# Altium PCB 01SignalDetect.PcbDoc (part 2 of 2)
Units mil, origin at the board's own origin, x right, y up, seen from the top; angles counter-clockwise.
Board outline 5526.23 x 3781.16 mil, 2 copper layers (Top Layer, Bottom Layer); 155 components, 60 nets, 423 pads, 168 vias.
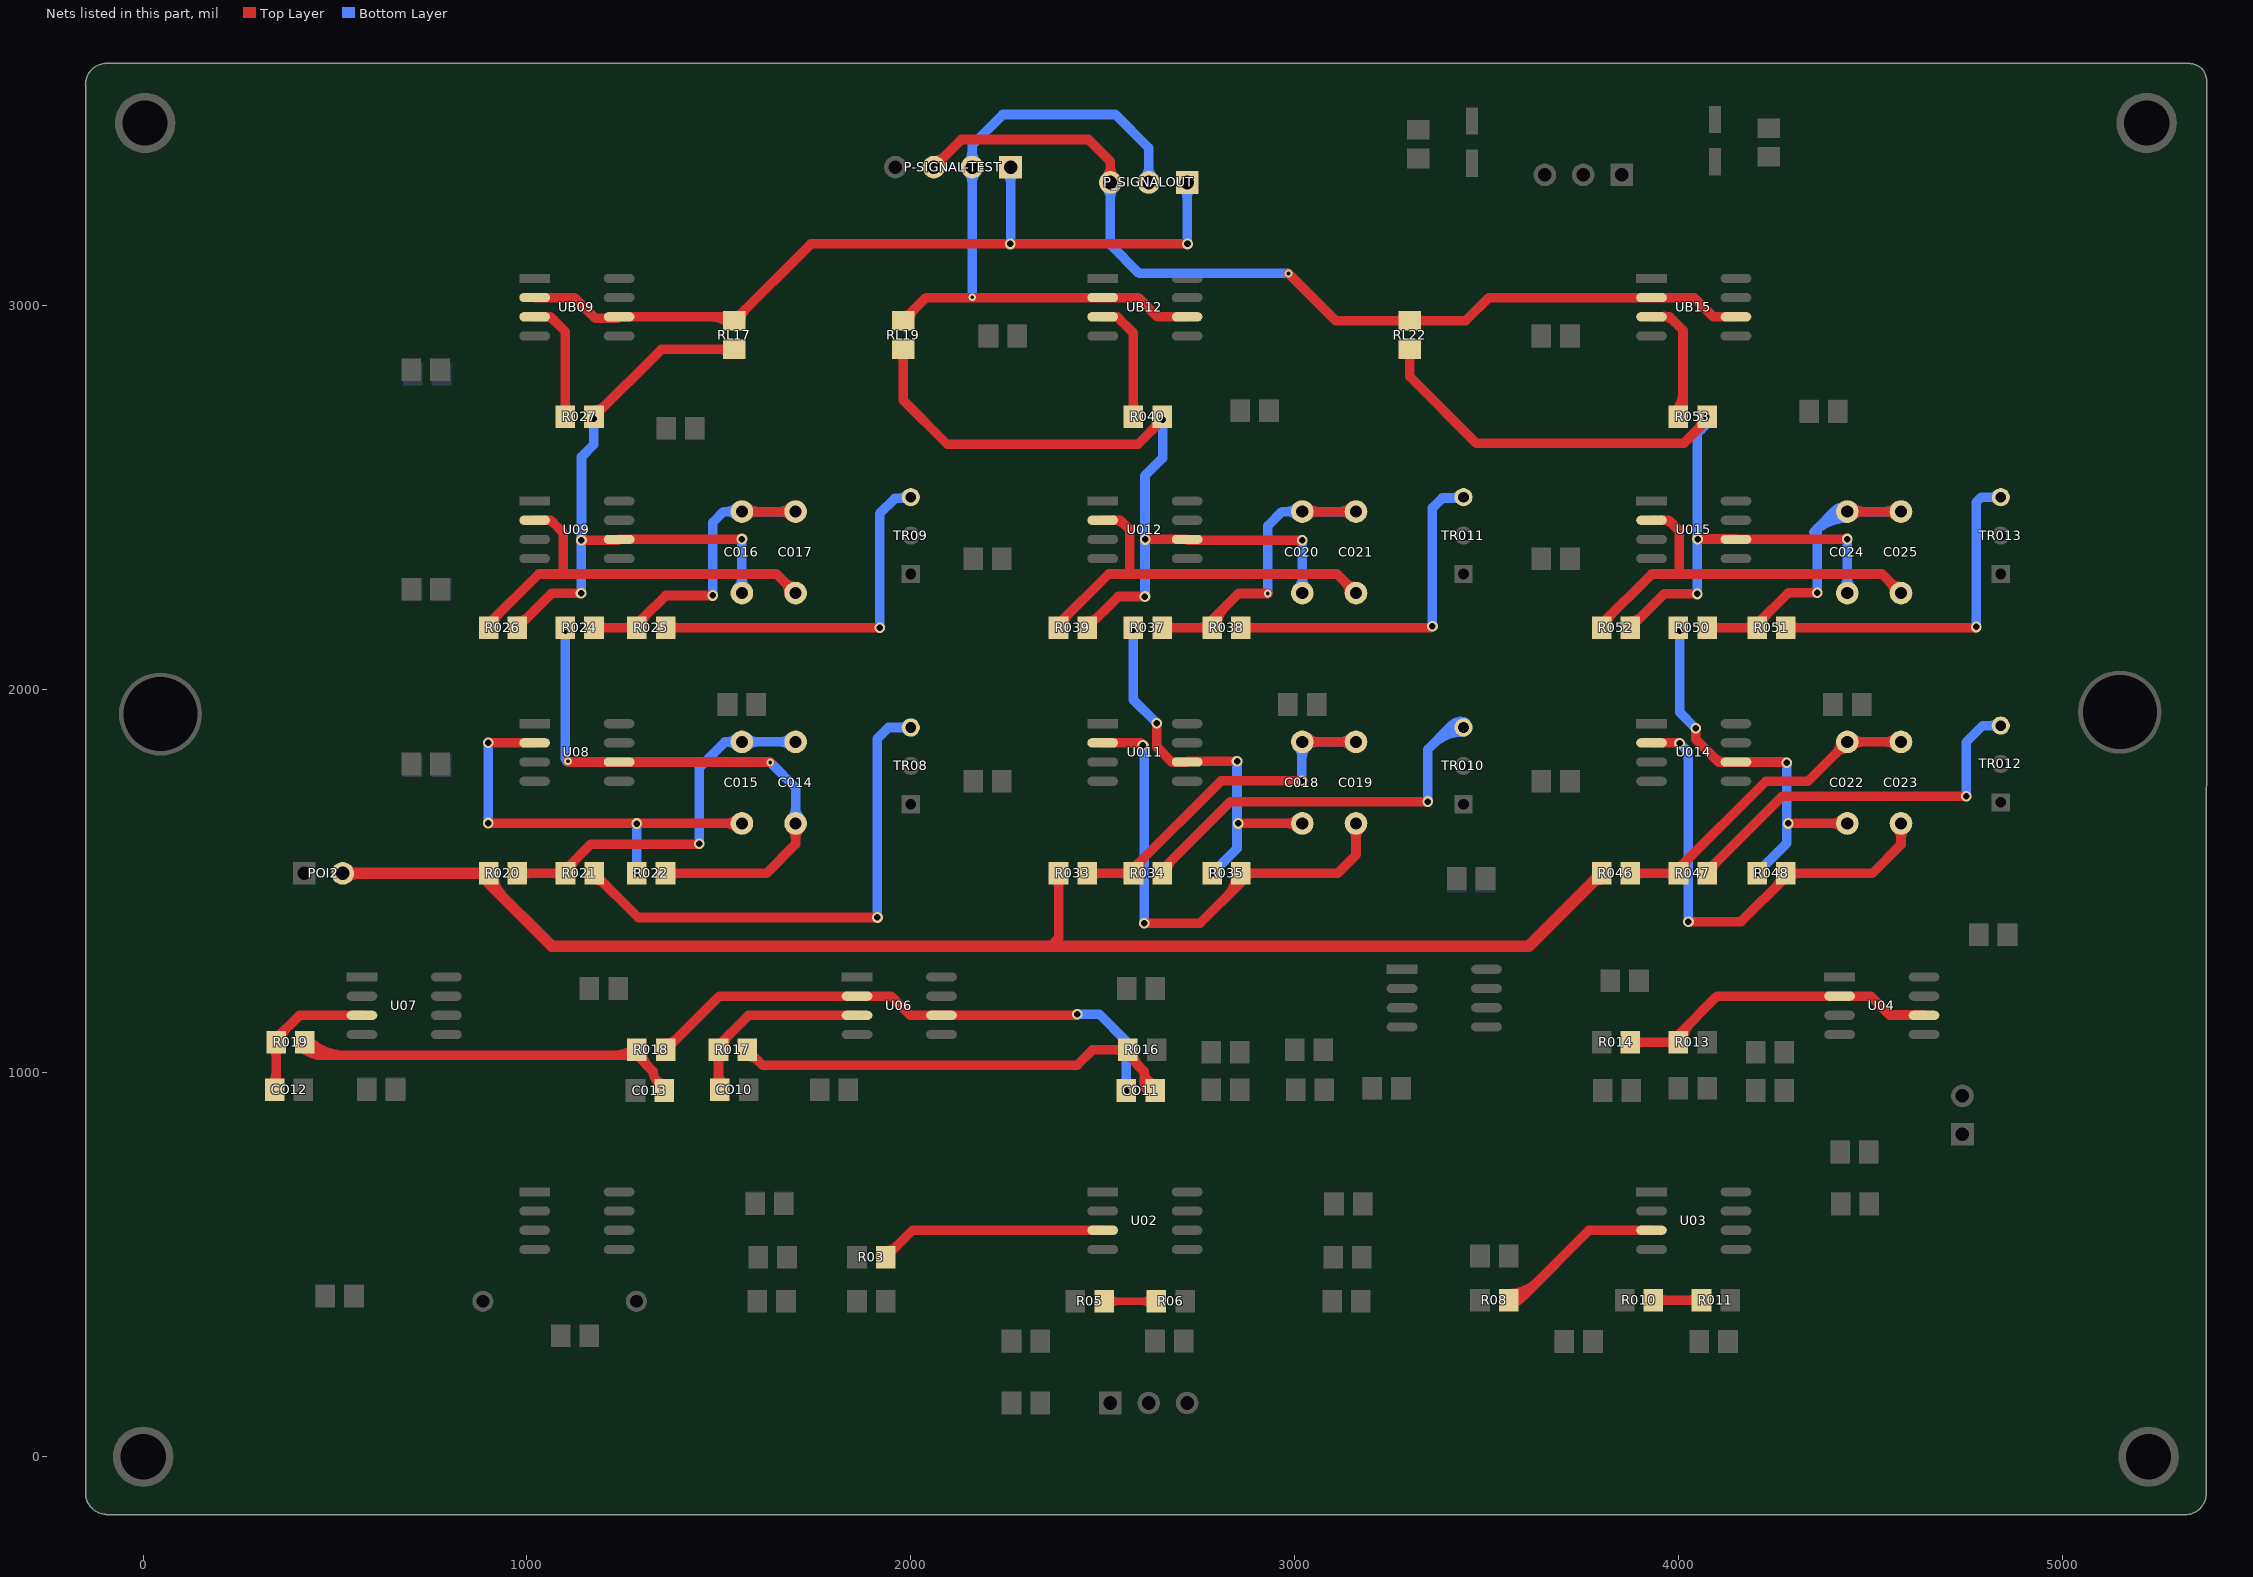
[diagram p2: the nets of this part, all layers, seen from the top]

## Via types
v1: diameter 28, hole 17, Top Layer to Bottom Layer, 87 vias
v2: diameter 20, hole 10, Top Layer to Bottom Layer, 44 vias
v3: diameter 25, hole 15, Top Layer to Bottom Layer, 30 vias
v4: diameter 30, hole 20, Top Layer to Bottom Layer, 7 vias

## Nets (pads, with @x,y where several pads share a name; then routed paths per layer and width w, separated by ;. In a path a pad name is that pad's centre, name@x,y a point inside that pad or via, vN(x,y) a via of type N, cw(c..) or ccw(c..) an arc to the next point about the centre after c; other vN are vias at no path point) (continued)
NetC013_2: C013.2 R018.2 R019.1 | length 1373.8
  Top Layer w25: R019.1@412.96,1067.64 ccw(c465.21,1119.89) 465.21,1046 ; R019.1@421.38,1080 455.38,1046 1272.41,1046 R018.2@1286.41,1060 1286.41,1046.3 1328.69,1004.03 ccw(c1361.91,1004.03) C013.2@1358.68,970.97 ; R019.1@430.64,1085.32 ccw(c525.57,1180.24) 525.57,1046 ; 1230.51,1046 ccw(c1230.51,1111.96) R018.2@1277.16,1065.32 ; R019.1@421.38,1062.97 cw(c421.38,1021.86) 450.45,1050.93 ccw(c421.38,1021.86) R019.1@421.38,1062.97 ; R018.2@1299.5,1056.06 ccw(c1354.67,1056.06) 1315.66,1017.06 cw(c1354.67,1056.06) R018.2@1299.5,1056.06
NetC014_1: C014.1 R022.2 R024.1 U08.6 | length 1875.6
  Top Layer w25: v2(1100,2149) R024.1@1100,2160 ; v2(1107,1812) 1109,1810 U08.6@1240,1810 1633,1810 v2(1634,1809) ; R022.2@1361.02,1520 1624,1520 1700,1596 C014.1@1700,1650 ; 1392.62,1520 cw(c1392.62,1551.6) 1370.28,1529.26 ccw(c1392.62,1551.6) 1392.62,1520 ; 1392.62,1520 ccw(c1392.62,1488.4) 1370.28,1510.74 cw(c1392.62,1488.4) 1392.62,1520 ; 1700,1608.89 cw(c1741.11,1608.89) 1712.04,1637.96 ccw(c1741.11,1608.89) 1700,1608.89 ; 1700,1608.89 ccw(c1658.89,1608.89) 1687.96,1637.96 cw(c1658.89,1608.89) 1700,1608.89
  Bottom Layer w25: v2(1100,2149) 1100,1819 v2(1107,1812) ; v2(1634,1809) 1700,1743 C014.1@1700,1650 ; 1700,1691.11 cw(c1658.89,1691.11) 1687.96,1662.04 ccw(c1658.89,1691.11) 1700,1691.11 ; 1700,1691.11 ccw(c1741.11,1691.11) 1712.04,1662.04 cw(c1741.11,1691.11) 1700,1691.11 ; 1100,1822.86 ccw(c1117.86,1822.86) 1105.23,1810.23 cw(c1117.86,1822.86) 1100,1822.86
NetC014_2: C014.2 C015.2 R020.2 R021.2 | length 1645.1
  Top Layer w25: R020.2@974.8,1520 R021.2@1100.2,1520 1100.2,1529.31 1166.89,1596 1448,1596 v1(1449,1597) ; 1006.41,1520 cw(c1006.41,1551.6) 984.06,1529.26 ccw(c1006.41,1551.6) 1006.41,1520 ; 1006.41,1520 ccw(c1006.41,1488.4) 984.06,1510.74 cw(c1006.41,1488.4) 1006.41,1520 ; 1068.59,1520 cw(c1068.59,1488.4) 1090.94,1510.74 ccw(c1068.59,1488.4) 1068.59,1520 ; 1068.59,1520 ccw(c1068.59,1551.6) 1090.94,1529.26 cw(c1068.59,1551.6) 1068.59,1520 ; R021.2@1113.29,1523.94 cw(c1157.85,1523.94) 1126.34,1555.45 ccw(c1157.85,1523.94) R021.2@1113.29,1523.94
  Bottom Layer w25: v1(1449,1597) 1449,1796 1515.6,1862.6 C015.2@1560,1862.6 C014.2@1700,1862.6 ; 1518.89,1862.6 cw(c1518.89,1821.49) 1547.96,1850.56 ccw(c1518.89,1821.49) 1518.89,1862.6 ; 1518.89,1862.6 ccw(c1518.89,1903.71) 1547.96,1874.64 cw(c1518.89,1903.71) 1518.89,1862.6 ; 1601.11,1862.6 cw(c1601.11,1903.71) 1572.04,1874.64 ccw(c1601.11,1903.71) 1601.11,1862.6 ; 1601.11,1862.6 ccw(c1601.11,1821.49) 1572.04,1850.56 cw(c1601.11,1821.49) 1601.11,1862.6 ; 1658.89,1862.6 cw(c1658.89,1821.49) 1687.96,1850.56 ccw(c1658.89,1821.49) 1658.89,1862.6 ; 1658.89,1862.6 ccw(c1658.89,1903.71) 1687.96,1874.64 cw(c1658.89,1903.71) 1658.89,1862.6
NetC015_1: C015.1 R022.1 U08.2 | length 1252.6
  Top Layer w25: v1(899,1651) 898,1650 C015.1@1560,1650 ; v1(899,1860) U08.2@1020,1860 ; v1@1286,1650 v1(1286.22,1649.78) ; 1518.89,1650 cw(c1518.89,1608.89) 1547.96,1637.96 ccw(c1518.89,1608.89) 1518.89,1650 ; 1518.89,1650 ccw(c1518.89,1691.11) 1547.96,1662.04 cw(c1518.89,1691.11) 1518.89,1650
  Bottom Layer w25: v1(899,1651) v1(899,1860) ; v1(1286.22,1520) v1(1286.22,1649.78)
NetC016_1: C016.1 R026.2 R027.2 RL17.2 U09.6 | length 1945.8
  Top Layer w25: R026.2@974.8,2160 1064.8,2250 v1(1141,2250) ; v1(1142,2388) 1238,2388 U09.6@1240,2390 1559,2390 v1(1560,2391) ; R027.2@1174.8,2710 1350,2885.2 RL17.2@1540,2885.2 ; R027.2@1174.8,2727.03 ccw(c1174.8,2768.14) 1203.87,2739.07 ; RL17.2@1526.81,2875.94 ccw(c1504.46,2853.59) 1504.46,2885.2 ccw(c1504.46,2916.8) RL17.2@1526.81,2894.45 ; R026.2@974.8,2177.03 ccw(c974.8,2218.14) 1003.87,2189.07 cw(c974.8,2218.14) R026.2@974.8,2177.03
  Bottom Layer w25: v1(1141,2250) 1141,2387 v1(1142,2388) 1142,2605 1174,2637 v1(1174,2705) ; C016.1@1560,2250 v1(1560,2391) ; 1560,2291.11 cw(c1518.89,2291.11) 1547.96,2262.04 ccw(c1518.89,2291.11) 1560,2291.11 ; 1560,2291.11 ccw(c1601.11,2291.11) 1572.04,2262.04 cw(c1601.11,2291.11) 1560,2291.11
NetC016_2: C016.2 C017.2 R024.2 R025.2 | length 1821.6
  Top Layer w25: R024.2@1174.8,2160 R025.2@1286.41,2160 1286.41,2169.31 1330,2212.89 1330.89,2212.89 1362,2244 v1(1484,2244) ; C016.2@1560,2462.6 C017.2@1700,2462.6 ; 1206.41,2160 cw(c1206.41,2191.6) 1184.06,2169.26 ccw(c1206.41,2191.6) 1206.41,2160 ; 1206.41,2160 ccw(c1206.41,2128.4) 1184.06,2150.74 cw(c1206.41,2128.4) 1206.41,2160 ; 1254.81,2160 cw(c1254.81,2128.4) 1277.16,2150.74 ccw(c1254.81,2128.4) 1254.81,2160 ; 1254.81,2160 ccw(c1254.81,2191.6) 1277.16,2169.26 cw(c1254.81,2191.6) 1254.81,2160 ; 1601.11,2462.6 cw(c1601.11,2503.71) 1572.04,2474.64 ccw(c1601.11,2503.71) 1601.11,2462.6 ; 1601.11,2462.6 ccw(c1601.11,2421.49) 1572.04,2450.56 cw(c1601.11,2421.49) 1601.11,2462.6 ; 1658.89,2462.6 cw(c1658.89,2421.49) 1687.96,2450.56 ccw(c1658.89,2421.49) 1658.89,2462.6 ; 1658.89,2462.6 ccw(c1658.89,2503.71) 1687.96,2474.64 cw(c1658.89,2503.71) 1658.89,2462.6 ; R025.2@1299.5,2163.94 cw(c1344.07,2163.94) 1312.55,2195.45 ccw(c1344.07,2163.94) R025.2@1299.5,2163.94
  Bottom Layer w25: v1(1484,2244) 1484,2434 1512.6,2462.6 C016.2@1560,2462.6 C017.2@1700,2462.6 ; 1518.89,2462.6 cw(c1518.89,2421.49) 1547.96,2450.56 ccw(c1518.89,2421.49) 1518.89,2462.6 ; 1518.89,2462.6 ccw(c1518.89,2503.71) 1547.96,2474.64 cw(c1518.89,2503.71) 1518.89,2462.6 ; 1601.11,2462.6 cw(c1601.11,2503.71) 1572.04,2474.64 ccw(c1601.11,2503.71) 1601.11,2462.6 ; 1601.11,2462.6 ccw(c1601.11,2421.49) 1572.04,2450.56 cw(c1601.11,2421.49) 1601.11,2462.6 ; 1658.89,2462.6 cw(c1658.89,2421.49) 1687.96,2450.56 ccw(c1658.89,2421.49) 1658.89,2462.6 ; 1658.89,2462.6 ccw(c1658.89,2503.71) 1687.96,2474.64 cw(c1658.89,2503.71) 1658.89,2462.6
NetC017_1: C017.1 R026.1 U09.2 | length 1362.4
  Top Layer w25: R026.1@900,2160 900,2169.31 1030.72,2300.03 1649.97,2300.03 C017.1@1700,2250 ; U09.2@1020,2440 1062,2440 1095,2407 1095,2314 ; 1670.93,2279.07 cw(c1641.86,2250) 1682.97,2250 ccw(c1641.86,2250) 1670.93,2279.07 ; 1670.93,2279.07 ccw(c1700,2308.14) 1700,2267.03 cw(c1700,2308.14) 1670.93,2279.07 ; R026.1@913.09,2163.94 cw(c957.65,2163.94) 926.14,2195.45 ccw(c957.65,2163.94) R026.1@913.09,2163.94 ; U09.2@1047.95,2440.5 cw(c1050.58,2414.58) 1069,2433 ccw(c1050.58,2414.58) U09.2@1047.95,2440.5 ; U09.2@1048,2440.5 cw(c1048,2407.91) 1071.05,2430.95 ccw(c1048,2407.91) U09.2@1048,2440.5
NetC018_1: C018.1 R035.2 R037.1 U011.6 | length 1218.8
  Top Layer w25: v1(2641,1911) 2641,1849 2680,1810 U011.6@2720,1810 2722,1812 v1(2850,1812) ; v1(2853,1650) C018.1@3020,1650 ; 2978.89,1650 cw(c2978.89,1608.89) 3007.96,1637.96 ccw(c2978.89,1608.89) 2978.89,1650 ; 2978.89,1650 ccw(c2978.89,1691.11) 3007.96,1662.04 cw(c2978.89,1691.11) 2978.89,1650 ; 2672.37,1817.63 ccw(c2692,1837.26) 2692,1809.5 cw(c2692,1837.26) 2672.37,1817.63
  Bottom Layer w25: v1(2580,2155) 2580,1972 v1(2641,1911) ; v1(2785.2,1520) 2850,1584.8 v1@2850,1650 ; v1(2850,1812) v1@2850,1650 ; v1(2853,1650) v1@2850,1650
NetC018_2: C018.2 C019.2 R033.2 R034.2 | length 1987.1
  Top Layer w25: R033.2@2459.8,1520 R034.2@2580.2,1520 ; R034.2@2580.2,1529.31 R034.2@2580.2,1520 ; v1(3019,1761) 2808,1761 2580.2,1533.2 R034.2@2580.2,1520 ; C018.2@3020,1862.6 C019.2@3160,1862.6 ; 2491.41,1520 cw(c2491.41,1551.6) 2469.06,1529.26 ccw(c2491.41,1551.6) 2491.41,1520 ; 2491.41,1520 ccw(c2491.41,1488.4) 2469.06,1510.74 cw(c2491.41,1488.4) 2491.41,1520 ; 2548.59,1520 cw(c2548.59,1488.4) 2570.94,1510.74 ccw(c2548.59,1488.4) 2548.59,1520 ; 2548.59,1520 ccw(c2548.59,1551.6) 2570.94,1529.26 cw(c2548.59,1551.6) 2548.59,1520 ; 3061.11,1862.6 cw(c3061.11,1903.71) 3032.04,1874.64 ccw(c3061.11,1903.71) 3061.11,1862.6 ; 3061.11,1862.6 ccw(c3061.11,1821.49) 3032.04,1850.56 cw(c3061.11,1821.49) 3061.11,1862.6 ; 3118.89,1862.6 cw(c3118.89,1821.49) 3147.96,1850.56 ccw(c3118.89,1821.49) 3118.89,1862.6 ; 3118.89,1862.6 ccw(c3118.89,1903.71) 3147.96,1874.64 cw(c3118.89,1903.71) 3118.89,1862.6 ; R034.2@2593.29,1523.94 cw(c2647.24,1523.94) 2609.09,1562.09 ccw(c2647.24,1523.94) R034.2@2593.29,1523.94
  Bottom Layer w25: v1(3019,1761) 3019,1861.6 C018.2@3020,1862.6 C019.2@3160,1862.6 ; C018.2@3032.04,1850.56 cw(c3061.11,1821.49) 3061.11,1862.6 ; C018.2@3032.04,1850.56 ccw(c3063.52,1819.08) 3019,1819.08 cw(c3063.52,1819.08) C018.2@3032.04,1850.56 ; C018.2@3032.04,1850.56 cw(c3061.11,1821.49) 3061.11,1862.6 ; 3061.11,1862.6 cw(c3061.11,1903.71) 3032.04,1874.64 ccw(c3061.11,1903.71) 3061.11,1862.6 ; 3118.89,1862.6 cw(c3118.89,1821.49) 3147.96,1850.56 ccw(c3118.89,1821.49) 3118.89,1862.6 ; 3118.89,1862.6 ccw(c3118.89,1903.71) 3147.96,1874.64 cw(c3118.89,1903.71) 3118.89,1862.6 ; C018.2@3007.96,1850.56 cw(c2981.31,1823.9) 3019,1823.9 ccw(c2981.31,1823.9) C018.2@3007.96,1850.56
NetC019_1: C019.1 R035.1 U011.2 | length 1683.7
  Top Layer w25: U011.2@2500,1860 2599,1860 v1(2605,1854) ccw(c2590.51,1839.51) 2590.51,1860 ; 2586.89,1860 cw(c2586.89,1835.89) v1@2603.94,1852.94 ; v1(2608,1390) 2754,1390 2860,1496 R035.1@2860,1520 3112,1520 3160,1568 C019.1@3160,1650 ; 2891.6,1520 cw(c2891.6,1551.6) 2869.26,1529.26 ccw(c2891.6,1551.6) 2891.6,1520 ; 2891.6,1520 ccw(c2891.6,1488.4) 2869.26,1510.74 cw(c2891.6,1488.4) 2891.6,1520 ; 3160,1608.89 cw(c3201.11,1608.89) 3172.04,1637.96 ccw(c3201.11,1608.89) 3160,1608.89 ; 3160,1608.89 ccw(c3118.89,1608.89) 3147.96,1637.96 cw(c3118.89,1608.89) 3160,1608.89 ; 2823.47,1459.47 ccw(c2766.87,1516.06) 2846.91,1516.06 cw(c2766.87,1516.06) 2823.47,1459.47
  Bottom Layer w25: v1(2605,1854) 2608,1851 v1(2608,1390)
NetC020_1: C020.1 R039.2 R040.2 RL19.2 U012.6 | length 2381.1
  Top Layer w25: RL19.2@1970.74,2875.94 cw(c1948.4,2853.59) 1980,2853.59 cw(c2011.6,2853.59) RL19.2@1989.26,2875.94 ; RL19.2@1980,2885.2 1980,2753 2095,2638 2592.11,2638 2654.8,2700.69 R040.2@2654.8,2710 ; R039.2@2459.8,2160 2541,2241.2 v1(2610.2,2241.2) ; v1(2611.2,2390) U012.6@2720,2390 2722,2388 v1(3020,2388) ; 2628.66,2674.55 ccw(c2597.15,2706.06) R040.2@2641.71,2706.06 ; R039.2@2459.8,2177.03 ccw(c2459.8,2218.14) 2488.87,2189.07 cw(c2459.8,2218.14) R039.2@2459.8,2177.03
  Bottom Layer w25: v1(2610.2,2241.2) v1@2610.2,2389 ; v1(2611.2,2390) v1@2610.2,2389 ; v1(2656,2702) 2656,2602 2610.2,2556.2 v1@2610.2,2389 ; C020.1@3020,2250 v1(3020,2388) ; 3020,2291.11 cw(c2978.89,2291.11) 3007.96,2262.04 ccw(c2978.89,2291.11) 3020,2291.11 ; 3020,2291.11 ccw(c3061.11,2291.11) 3032.04,2262.04 cw(c3061.11,2291.11) 3020,2291.11
NetC020_2: C020.2 C021.2 R037.2 R038.2 | length 1841.1
  Top Layer w25: R037.2@2654.8,2160 R038.2@2785.2,2160 2785.2,2180.2 2854,2249 v2(2930,2249) ; C020.2@3020,2462.6 C021.2@3160,2462.6 ; 2686.41,2160 cw(c2686.41,2191.6) 2664.06,2169.26 ccw(c2686.41,2191.6) 2686.41,2160 ; 2686.41,2160 ccw(c2686.41,2128.4) 2664.06,2150.74 cw(c2686.41,2128.4) 2686.41,2160 ; 2753.59,2160 cw(c2753.59,2128.4) 2775.94,2150.74 ccw(c2753.59,2128.4) 2753.59,2160 ; 2753.59,2160 ccw(c2753.59,2191.6) 2775.94,2169.26 cw(c2753.59,2191.6) 2753.59,2160 ; 3061.11,2462.6 cw(c3061.11,2503.71) 3032.04,2474.64 ccw(c3061.11,2503.71) 3061.11,2462.6 ; 3061.11,2462.6 ccw(c3061.11,2421.49) 3032.04,2450.56 cw(c3061.11,2421.49) 3061.11,2462.6 ; 3118.89,2462.6 cw(c3118.89,2421.49) 3147.96,2450.56 ccw(c3118.89,2421.49) 3118.89,2462.6 ; 3118.89,2462.6 ccw(c3118.89,2503.71) 3147.96,2474.64 cw(c3118.89,2503.71) 3118.89,2462.6 ; R038.2@2798.29,2163.94 cw(c2869.14,2163.94) 2819.04,2214.04 ccw(c2869.14,2163.94) R038.2@2798.29,2163.94
  Bottom Layer w25: v2(2930,2249) 2930,2425 2967.6,2462.6 C020.2@3020,2462.6 C021.2@3160,2462.6 ; 2978.89,2462.6 cw(c2978.89,2421.49) 3007.96,2450.56 ccw(c2978.89,2421.49) 2978.89,2462.6 ; 2978.89,2462.6 ccw(c2978.89,2503.71) 3007.96,2474.64 cw(c2978.89,2503.71) 2978.89,2462.6 ; 3061.11,2462.6 cw(c3061.11,2503.71) 3032.04,2474.64 ccw(c3061.11,2503.71) 3061.11,2462.6 ; 3061.11,2462.6 ccw(c3061.11,2421.49) 3032.04,2450.56 cw(c3061.11,2421.49) 3061.11,2462.6 ; 3118.89,2462.6 cw(c3118.89,2421.49) 3147.96,2450.56 ccw(c3118.89,2421.49) 3118.89,2462.6 ; 3118.89,2462.6 ccw(c3118.89,2503.71) 3147.96,2474.64 cw(c3118.89,2503.71) 3118.89,2462.6
NetC021_1: C021.1 R039.1 U012.2 | length 1379.9
  Top Layer w25: R039.1@2385,2160 2385,2169.31 2515.72,2300.03 2570,2300.03 ; U012.2@2500,2440 2546,2440 2570,2416 2570,2300.03 ; C021.1@3160,2250 3109.97,2300.03 2570,2300.03 ; 3130.93,2279.07 cw(c3101.86,2250) 3142.97,2250 ccw(c3101.86,2250) 3130.93,2279.07 ; 3130.93,2279.07 ccw(c3160,2308.14) 3160,2267.03 cw(c3160,2308.14) 3130.93,2279.07 ; R039.1@2398.09,2163.94 cw(c2442.65,2163.94) 2411.14,2195.45 ccw(c2442.65,2163.94) R039.1@2398.09,2163.94 ; U012.2@2527.94,2440.5 cw(c2531.59,2407.59) 2555,2431 ccw(c2531.59,2407.59) U012.2@2527.94,2440.5 ; U012.2@2528,2440.5 cw(c2528,2398.25) 2557.87,2428.13 ccw(c2528,2398.25) U012.2@2528,2440.5
NetC022_1: C022.1 R048.2 R050.1 U014.6 | length 1231.6
  Top Layer w25: v1(4045,1898) 4045,1870 4105,1810 U014.6@4150,1810 4280,1810 v1(4282,1808) ; R048.2@4205.2,1520 v1(4205.2,1521.2) ; v1(4286,1650) C022.1@4440,1650 ; 4398.89,1650 cw(c4398.89,1608.89) 4427.96,1637.96 ccw(c4398.89,1608.89) 4398.89,1650 ; 4398.89,1650 ccw(c4398.89,1691.11) 4427.96,1662.04 cw(c4398.89,1691.11) 4398.89,1650 ; 4093.83,1821.17 ccw(c4122,1849.33) 4122,1809.5 cw(c4122,1849.33) 4093.83,1821.17
  Bottom Layer w25: v1(4003,2152) 4003,1940 v1(4045,1898) ; v1(4205.2,1521.2) 4282,1598 v1@4282,1650 ; v1(4282,1808) v1@4282,1650 ; v1(4286,1650) v1@4282,1650
NetC022_2: C022.2 C023.2 R046.2 R047.2 | length 1521.2
  Top Layer w25: R046.2@3874.8,1520 R047.2@4000.2,1520 4000.2,1532.2 4228,1760 4337.4,1760 C022.2@4440,1862.6 C023.2@4580,1862.6 ; 3906.41,1520 cw(c3906.41,1551.6) 3884.06,1529.26 ccw(c3906.41,1551.6) 3906.41,1520 ; 3906.41,1520 ccw(c3906.41,1488.4) 3884.06,1510.74 cw(c3906.41,1488.4) 3906.41,1520 ; 3968.59,1520 cw(c3968.59,1488.4) 3990.94,1510.74 ccw(c3968.59,1488.4) 3968.59,1520 ; 3968.59,1520 ccw(c3968.59,1551.6) 3990.94,1529.26 cw(c3968.59,1551.6) 3968.59,1520 ; 4410.93,1833.53 cw(c4440,1804.46) 4440,1845.57 ccw(c4440,1804.46) 4410.93,1833.53 ; 4410.93,1833.53 ccw(c4381.86,1862.6) 4422.97,1862.6 cw(c4381.86,1862.6) 4410.93,1833.53 ; 4481.11,1862.6 cw(c4481.11,1903.71) 4452.04,1874.64 ccw(c4481.11,1903.71) 4481.11,1862.6 ; 4481.11,1862.6 ccw(c4481.11,1821.49) 4452.04,1850.56 cw(c4481.11,1821.49) 4481.11,1862.6 ; 4538.89,1862.6 cw(c4538.89,1821.49) 4567.96,1850.56 ccw(c4538.89,1821.49) 4538.89,1862.6 ; 4538.89,1862.6 ccw(c4538.89,1903.71) 4567.96,1874.64 cw(c4538.89,1903.71) 4538.89,1862.6 ; R047.2@4013.29,1523.94 cw(c4064.83,1523.94) 4028.38,1560.38 ccw(c4064.83,1523.94) R047.2@4013.29,1523.94
NetC023_1: C023.1 R048.1 U014.2 | length 1544.1
  Top Layer w25: U014.2@3930,1860 4002,1860 v1(4003,1859) ; v1(4026,1394) 4163.31,1394 4280,1510.69 R048.1@4280,1520 4505,1520 4580,1595 C023.1@4580,1650 ; 4311.6,1520 cw(c4311.6,1551.6) 4289.26,1529.26 ccw(c4311.6,1551.6) 4311.6,1520 ; 4311.6,1520 ccw(c4311.6,1488.4) 4289.26,1510.74 cw(c4311.6,1488.4) 4311.6,1520 ; 4580,1608.89 cw(c4621.11,1608.89) 4592.04,1637.96 ccw(c4621.11,1608.89) 4580,1608.89 ; 4580,1608.89 ccw(c4538.89,1608.89) 4567.96,1637.96 cw(c4538.89,1608.89) 4580,1608.89 ; 4253.86,1484.55 ccw(c4222.35,1516.06) 4266.91,1516.06 cw(c4222.35,1516.06) 4253.86,1484.55
  Bottom Layer w25: v1(4003,1859) 4026,1836 v1(4026,1394)
NetC024_1: C024.1 R052.2 R053.2 RL22.2 U015.6 | length 2508.9
  Top Layer w25: RL22.2@3290.74,2875.94 cw(c3268.4,2853.59) 3300,2853.59 cw(c3331.6,2853.59) RL22.2@3309.26,2875.94 ; RL22.2@3300,2885.2 3300,2814 3473,2641 4015.11,2641 4074.8,2700.69 R053.2@4074.8,2710 v1(4073,2710) ; R052.2@3874.8,2160 3962.8,2248 v1(4049,2248) ; 4048.66,2674.55 ccw(c4017.15,2706.06) R053.2@4061.71,2706.06 ; v1(4050,2391) 4149,2391 U015.6@4150,2390 4439,2390 v1(4440,2391) ; R053.2@4062.58,2688.47 ccw(c4041.06,2710) R053.2@4071.5,2710 ; R052.2@3874.8,2177.03 ccw(c3874.8,2218.14) 3903.87,2189.07 cw(c3874.8,2218.14) R052.2@3874.8,2177.03
  Bottom Layer w25: v1(4049,2248) v1@4049,2390 ; v1(4050,2391) v1@4049,2390 ; 4059,2676 ccw(c4028.5,2706.51) v1@4071.5,2709.88 ; v1(4073,2710) 4073,2690 4049,2666 v1@4049,2390 ; C024.1@4440,2250 v1(4440,2391) ; 4440,2291.11 cw(c4398.89,2291.11) 4427.96,2262.04 ccw(c4398.89,2291.11) 4440,2291.11 ; 4440,2291.11 ccw(c4481.11,2291.11) 4452.04,2262.04 cw(c4481.11,2291.11) 4440,2291.11
NetC024_2: C024.2 C025.2 R050.2 R051.2 | length 2201.8
  Top Layer w25: R050.2@4074.8,2160 R051.2@4205.2,2160 4205.2,2169.31 4286.89,2251 v1(4362,2251) ; C024.2@4440,2462.6 C025.2@4580,2462.6 ; 4106.41,2160 cw(c4106.41,2191.6) 4084.06,2169.26 ccw(c4106.41,2191.6) 4106.41,2160 ; 4106.41,2160 ccw(c4106.41,2128.4) 4084.06,2150.74 cw(c4106.41,2128.4) 4106.41,2160 ; 4173.59,2160 cw(c4173.59,2128.4) 4195.94,2150.74 ccw(c4173.59,2128.4) 4173.59,2160 ; 4173.59,2160 ccw(c4173.59,2191.6) 4195.94,2169.26 cw(c4173.59,2191.6) 4173.59,2160 ; 4481.11,2462.6 cw(c4481.11,2503.71) 4452.04,2474.64 ccw(c4481.11,2503.71) 4481.11,2462.6 ; 4481.11,2462.6 ccw(c4481.11,2421.49) 4452.04,2450.56 cw(c4481.11,2421.49) 4481.11,2462.6 ; 4538.89,2462.6 cw(c4538.89,2421.49) 4567.96,2450.56 ccw(c4538.89,2421.49) 4538.89,2462.6 ; 4538.89,2462.6 ccw(c4538.89,2503.71) 4567.96,2474.64 cw(c4538.89,2503.71) 4538.89,2462.6 ; R051.2@4218.29,2163.94 cw(c4262.85,2163.94) 4231.34,2195.45 ccw(c4262.85,2163.94) R051.2@4218.29,2163.94
  Bottom Layer w25: 4352.2,2409.2 cw(c4440,2321.41) 4440,2445.57 ccw(c4440,2321.41) 4365.62,2420.83 ; v1(4362,2251) 4362,2419 4405.6,2462.6 ; C025.2@4580,2462.6 C024.2@4440,2462.6 4405.6,2462.6 ; 4405.6,2462.6 cw(c4405.6,2436.36) 4426.46,2452.27 ccw(c4405.6,2436.36) 4405.6,2462.6 ; 4405.6,2462.6 ccw(c4405.6,2488.83) 4426.46,2472.92 cw(c4405.6,2488.83) 4405.6,2462.6 ; 4481.11,2462.6 cw(c4481.11,2503.71) 4452.04,2474.64 ccw(c4481.11,2503.71) 4481.11,2462.6 ; 4481.11,2462.6 ccw(c4481.11,2421.49) 4452.04,2450.56 cw(c4481.11,2421.49) 4481.11,2462.6 ; 4538.89,2462.6 cw(c4538.89,2421.49) 4567.96,2450.56 ccw(c4538.89,2421.49) 4538.89,2462.6 ; 4538.89,2462.6 ccw(c4538.89,2503.71) 4567.96,2474.64 cw(c4538.89,2503.71) 4538.89,2462.6 ; 4388.4,2445.4 cw(c4411.21,2422.58) 4430.06,2448.78 ccw(c4411.21,2422.58) 4388.4,2445.4 ; 4394.88,2451.88 cw(c4440,2406.76) 4440,2470.57 ccw(c4440,2406.76) 4394.88,2451.88 ; 4409.2,2466.19 cw(c4428.62,2446.77) 4444.66,2469.07 ccw(c4428.62,2446.77) 4409.2,2466.19
NetC025_1: C025.1 R052.1 U015.2 | length 1403.4
  Top Layer w25: R052.1@3800,2160 3800,2169.31 3930.72,2300.03 4002,2300.03 ; U015.2@3955.3,2440 U015.2@3930,2440 3975,2440 4002,2413 4002,2300.03 ; C025.1@4580,2250 4529.97,2300.03 4002,2300.03 ; 4550.93,2279.07 cw(c4521.86,2250) 4562.97,2250 ccw(c4521.86,2250) 4550.93,2279.07 ; 4550.93,2279.07 ccw(c4580,2308.14) 4580,2267.03 cw(c4580,2308.14) 4550.93,2279.07 ; R052.1@3813.09,2163.94 cw(c3857.65,2163.94) 3826.14,2195.45 ccw(c3857.65,2163.94) R052.1@3813.09,2163.94 ; U015.2@3957.95,2440.5 cw(c3961.34,2409.34) 3983.5,2431.5 ccw(c3961.34,2409.34) U015.2@3957.95,2440.5 ; U015.2@3958,2440.5 cw(c3958,2400.67) 3986.17,2428.83 ccw(c3958,2400.67) U015.2@3958,2440.5
NetCO10_2: CO10.2 R017.2 U06.3 | length 759.6
  Top Layer w25: CO10.2@1502.6,955.72 1498.98,959.34 R017.2@1498.98,1060 1498.98,1071.98 1577,1150 U06.3@1860,1150 ; 1498.98,1024.46 cw(c1530.58,1024.46) 1508.24,1046.81 ccw(c1530.58,1024.46) 1498.98,1024.46 ; 1498.98,1024.46 ccw(c1467.38,1024.46) 1489.72,1046.81 cw(c1467.38,1024.46) 1498.98,1024.46 ; 1498.98,1000 ccw(c1542.94,1000) 1511.85,968.91 cw(c1542.94,1000) 1498.98,1000 ; R017.2@1512.07,1063.94 cw(c1563.09,1063.94) 1527.01,1100.01 ccw(c1563.09,1063.94) R017.2@1512.07,1063.94
NetCO11_1: CO11.1 R018.1 U06.2 U06.6 | length 1502.6
  Top Layer w25: R018.1@1361.22,1060 1501.22,1200 U06.2@1860,1200 1949,1200 1999,1150 U06.6@2080,1150 2431,1150 v1(2434,1153) ; R018.1@1361.22,1077.03 ccw(c1361.22,1118.14) 1390.28,1089.07 cw(c1361.22,1118.14) R018.1@1361.22,1077.03
  Bottom Layer w25: v1(2434,1153) 2491,1153 2561.84,1082.16 v1(2561.84,954)
NetCO11_2: CO11.2 R016.2 R017.1 | length 1660
  Top Layer w25: R017.1@1573.78,1060 1613.78,1020 2433,1020 ; 2436,1023 2433,1020 ; CO11.2@2636.64,954 2607.93,982.71 2607.93,1004.03 ; 2433,1020 2473,1060 R016.2@2565.65,1060 2565.65,1046.3 2607.93,1004.03 ; 2534.05,1060 cw(c2534.05,1028.4) 2556.4,1050.74 ccw(c2534.05,1028.4) 2534.05,1060 ; 2534.05,1060 ccw(c2534.05,1091.6) 2556.4,1069.26 cw(c2534.05,1091.6) 2534.05,1060 ; 2607.93,1004.03 ccw(c2641.15,1004.03) 2637.92,970.97 cw(c2641.15,1004.03) 2607.93,1004.03 ; R017.1@1573.78,1042.97 cw(c1573.78,1001.86) 1602.85,1030.93 ccw(c1573.78,1001.86) R017.1@1573.78,1042.97 ; R016.2@2578.74,1056.06 ccw(c2633.91,1056.06) 2594.9,1017.06 cw(c2633.91,1056.06) R016.2@2578.74,1056.06 ; 2607.93,976.46 ccw(c2638.45,976.46) 2635.48,946.08 cw(c2638.45,976.46) 2607.93,976.46 ; 2609.9,980.74 ccw(c2633.6,1004.44) 2635.79,971 cw(c2633.6,1004.44) 2609.9,980.74
NetCO12_2: CO12.2 R019.2 U07.3 | length 624.1
  Top Layer w25: CO12.2@342.6,955.72 346.58,959.7 R019.2@346.58,1080 346.58,1089.31 407.27,1150 U07.3@570,1150 ; 346.58,1044.46 cw(c378.18,1044.46) 355.84,1066.81 ccw(c378.18,1044.46) 346.58,1044.46 ; 346.58,1044.46 ccw(c314.98,1044.46) 337.32,1066.81 cw(c314.98,1044.46) 346.58,1044.46 ; CO12.2@333.34,968.91 ccw(c301.38,1000.87) 346.58,1000.87 cw(c301.38,1000.87) CO12.2@333.34,968.91 ; R019.2@359.67,1083.94 cw(c404.23,1083.94) 372.72,1115.45 ccw(c404.23,1083.94) R019.2@359.67,1083.94
NetR03_2: R03.2 U02.3 | length 658.8
  Top Layer w25: R03.2@1934.8,520 2004.8,590 U02.3@2500,590 ; R03.2@1934.8,537.03 ccw(c1934.8,578.14) 1963.87,549.07 cw(c1934.8,578.14) R03.2@1934.8,537.03
NetR05_2: R05.2 R06.1 | length 254.5
  Top Layer w20: R05.2@2503.7,405 R06.1@2640,405 ; R05.2@2514.73,393.98 cw(c2541.34,367.36) 2541.34,405 cw(c2541.34,442.64) R05.2@2514.73,416.02 ; R06.1@2628.98,393.98 ccw(c2602.36,367.36) 2602.36,405 ccw(c2602.36,442.64) R06.1@2628.98,416.02
NetR08_2: R08.2 U03.3 | length 611.5
  Top Layer w25: R08.2@3557.8,400.03 ccw(c3557.8,446.44) 3590.62,413.62 ; R08.2@3557.8,420.8 R08.2@3557.8,408 3567.61,417.8 3594.8,417.8 ; R08.2@3557.8,425.03 ccw(c3557.8,531.79) 3633.3,456.3 ; R08.2@3568.43,404.29 cw(c3594.8,385.31) 3594.8,417.8 ; U03.3@3930,590 3767,590 3594.8,417.8
NetR010_2: R010.2 R011.1 | length 224.5
  Top Layer w25: R010.2@3934.8,408 R011.1@4060,408 ; R010.2@3944.06,398.74 cw(c3966.41,376.4) 3966.41,408 cw(c3966.41,439.6) R010.2@3944.06,417.26 ; R011.1@4050.74,398.74 ccw(c4028.4,376.4) 4028.4,408 ccw(c4028.4,439.6) R011.1@4050.74,417.26
NetR013_1: R013.1 R014.1 U04.2 U04.6 | length 1151.9
  Top Layer w25: R014.1@3875,1080 R013.1@4000,1080 4000,1099 4101,1200 U04.2@4420,1200 4501,1200 4550,1151 4639,1151 U04.6@4640,1150 ; 3906.6,1080 cw(c3906.6,1111.6) 3884.26,1089.26 ccw(c3906.6,1111.6) 3906.6,1080 ; 3906.6,1080 ccw(c3906.6,1048.4) 3884.26,1070.74 cw(c3906.6,1048.4) 3906.6,1080 ; 3968.4,1080 cw(c3968.4,1048.4) 3990.74,1070.74 ccw(c3968.4,1048.4) 3968.4,1080 ; 3968.4,1080 ccw(c3968.4,1111.6) 3990.74,1089.26 cw(c3968.4,1111.6) 3968.4,1080 ; R013.1@4013.09,1083.94 cw(c4081.06,1083.94) 4033,1132 ccw(c4081.06,1083.94) R013.1@4013.09,1083.94
NetR021_1: R021.1 TR08.3 | length 1502.4
  Top Layer w25: R021.1@1175,1520 1290,1405 v1(1913,1405) v1@1915,1407 ; R021.1@1175,1502.97 cw(c1175,1461.86) 1204.07,1490.93 ccw(c1175,1461.86) R021.1@1175,1502.97
  Bottom Layer w25: v1(1913,1405) 1913,1871 1942,1900 TR08.3@2000,1900 ; 1973.15,1900 cw(c1973.15,1873.15) 1992.14,1892.14 ccw(c1973.15,1873.15) 1973.15,1900 ; 1973.15,1900 ccw(c1973.15,1926.85) 1992.14,1907.86 cw(c1973.15,1926.85) 1973.15,1900
NetR025_1: R025.1 TR09.3 | length 1111.1
  Top Layer w25: R025.1@1361.22,2160 v1(1919,2160) ; 1392.82,2160 cw(c1392.82,2191.6) 1370.47,2169.26 ccw(c1392.82,2191.6) 1392.82,2160 ; 1392.82,2160 ccw(c1392.82,2128.4) 1370.47,2150.74 cw(c1392.82,2128.4) 1392.82,2160
  Bottom Layer w25: v1(1919,2160) 1919,2457 1959,2497 1997,2497 TR09.3@2000,2500 ; 1965.91,2497 ccw(c1965.91,2534.09) 1992.14,2507.86 cw(c1965.91,2534.09) 1965.91,2497
NetR027_1: R027.1 UB09.3 | length 506.7
  Top Layer w25: UB09.3@1020,2970 1061,2970 1100,2931 R027.1@1100,2710 ; 1100,2745.54 cw(c1068.4,2745.54) 1090.74,2723.19 ccw(c1068.4,2745.54) 1100,2745.54 ; 1100,2745.54 ccw(c1131.6,2745.54) 1109.26,2723.19 cw(c1131.6,2745.54) 1100,2745.54 ; UB09.3@1047.95,2970.5 cw(c1050.33,2946.33) 1067.5,2963.5 ccw(c1050.33,2946.33) UB09.3@1047.95,2970.5 ; UB09.3@1048,2970.5 cw(c1048,2940.32) 1069.34,2961.66 ccw(c1048,2940.32) UB09.3@1048,2970.5
NetR034_1: R034.1 TR010.3 | length 1627.2
  Top Layer w25: R034.1@2655,1520 2655,1529 2833,1707 v1(3347,1707) ; R034.1@2668.09,1523.94 cw(c2711.92,1523.94) 2680.93,1554.93 ccw(c2711.92,1523.94) R034.1@2668.09,1523.94
  Bottom Layer w25: v1(3347,1707) 3347,1843 3404,1900 TR010.3@3440.06,1900 ; 3413.21,1900 cw(c3413.21,1873.15) 3432.2,1892.14 ccw(c3413.21,1873.15) 3413.21,1900 ; 3413.21,1900 ccw(c3413.21,1926.85) 3432.2,1907.86 cw(c3413.21,1926.85) 3413.21,1900 ; 3359.51,1855.51 cw(c3440.06,1774.96) 3440.06,1888.88 ccw(c3440.06,1774.96) 3359.51,1855.51 ; 3385.97,1881.97 cw(c3416.16,1851.78) 3435.13,1890.03 ccw(c3416.16,1851.78) 3385.97,1881.97 ; 3402.19,1898.19 cw(c3440.06,1860.32) 3440.06,1913.88 ccw(c3440.06,1860.32) 3402.19,1898.19 ; 3410.59,1906.59 cw(c3432.48,1884.7) 3446.23,1912.43 ccw(c3432.48,1884.7) 3410.59,1906.59
NetR038_1: R038.1 TR011.3 | length 1053.4
  Top Layer w25: R038.1@2860,2160 3355,2160 v1(3359,2164) ; 2891.6,2160 cw(c2891.6,2191.6) 2869.26,2169.26 ccw(c2891.6,2191.6) 2891.6,2160 ; 2891.6,2160 ccw(c2891.6,2128.4) 2869.26,2150.74 cw(c2891.6,2128.4) 2891.6,2160
  Bottom Layer w25: v1(3359,2164) 3359,2472 3385,2498 3438,2498 TR011.3@3440,2500 ; 3408.32,2498 ccw(c3408.32,2531.68) 3432.14,2507.86 cw(c3408.32,2531.68) 3408.32,2498
NetR040_1: R040.1 UB12.3 | length 450.7
  Top Layer w25: UB12.3@2500,2970 2538,2970 2580,2928 R040.1@2580,2710 ; 2580,2745.54 cw(c2548.4,2745.54) 2570.74,2723.19 ccw(c2548.4,2745.54) 2580,2745.54 ; 2580,2745.54 ccw(c2611.6,2745.54) 2589.26,2723.19 cw(c2611.6,2745.54) 2580,2745.54 ; UB12.3@2528,2970.5 cw(c2528,2947.56) 2544.22,2963.78 ccw(c2528,2947.56) UB12.3@2528,2970.5
NetR047_1: R047.1 TR012.3 | length 1193.6
  Top Layer w25: R047.1@4075,1520 4075,1525 4271,1721 v1(4750,1721) ; R047.1@4075,1537.03 ccw(c4075,1566.06) 4095.53,1545.53 cw(c4075,1566.06) R047.1@4075,1537.03 ; R047.1@4088.09,1523.94 cw(c4122.26,1523.94) 4098.1,1548.1 ccw(c4122.26,1523.94) R047.1@4088.09,1523.94
  Bottom Layer w25: v1(4750,1721) 4750,1862 4793,1905 TR012.3@4840,1905 ; 4813.15,1905 cw(c4813.15,1878.15) 4832.14,1897.14 ccw(c4813.15,1878.15) 4813.15,1905 ; 4813.15,1905 ccw(c4813.15,1931.85) 4832.14,1912.86 cw(c4813.15,1931.85) 4813.15,1905
NetR051_1: R051.1 TR013.3 | length 1074.9
  Top Layer w25: R051.1@4280,2160 4774,2160 v1(4776,2162) ; 4311.6,2160 cw(c4311.6,2191.6) 4289.26,2169.26 ccw(c4311.6,2191.6) 4311.6,2160 ; 4311.6,2160 ccw(c4311.6,2128.4) 4289.26,2150.74 cw(c4311.6,2128.4) 4311.6,2160
  Bottom Layer w25: v1(4776,2162) 4776,2487 4789,2500 TR013.3@4840,2500 ; 4813.15,2500 cw(c4813.15,2473.15) 4832.14,2492.14 ccw(c4813.15,2473.15) 4813.15,2500 ; 4813.15,2500 ccw(c4813.15,2526.85) 4832.14,2507.86 cw(c4813.15,2526.85) 4813.15,2500
NetR053_1: R053.1 UB15.3 | length 573.2
  Top Layer w25: UB15.3@3930,2970 3977,2970 4012,2935 4012,2722 R053.1@4000,2710 ; UB15.3@3957.94,2970.5 cw(c3961.84,2935.84) 3986.5,2960.5 ccw(c3961.84,2935.84) UB15.3@3957.94,2970.5 ; UB15.3@3958,2970.5 cw(c3958,2925.84) 3989.58,2957.42 ccw(c3958,2925.84) UB15.3@3958,2970.5 ; R053.1@3990.74,2723.19 ccw(c3939.43,2774.51) 4012,2774.51 cw(c3939.43,2774.51) R053.1@3990.74,2723.19
PART_IN: POI2.2 R020.1 R033.1 R046.1 | length 3965.1
  Top Layer w25: POI2.2@532.04,1507.96 cw(c561.11,1478.89) 561.11,1520 cw(c561.11,1561.11) POI2.2@532.04,1532.04 ; R020.1@890.74,1510.74 ccw(c868.4,1488.4) 868.4,1520 ccw(c868.4,1551.6) R020.1@890.74,1529.26 ; R020.1@900,1495 R020.1@900,1520 ; 2364,1330 2385,1351 R033.1@2385,1520 R033.1@2385,1515 ; R033.1@2375.74,1506.81 cw(c2353.4,1484.46) 2385,1484.46 cw(c2416.6,1484.46) R033.1@2394.26,1506.81 ; R046.1@3800,1520 R046.1@3802,1518
  Top Layer w30: POI2.2@520,1520 R020.1@900,1520 ; POI2.2@530.27,1509.73 cw(c555.07,1484.93) 555.07,1520 cw(c555.07,1555.07) POI2.2@530.27,1530.27 ; R020.1@900,1495 1065,1330 2364,1330 3610,1330 R046.1@3800,1520 ; R020.1@910.59,1516.06 ccw(c987.01,1516.06) 932.97,1462.03 ; R046.1@3775.2,1495.2 cw(c3800,1470.4) R046.1@3800,1505.47
SIGNAL_LED17: P-SIGNAL-TEST.1 P_SIGNALOUT.1 RL17.1 UB09.2 UB09.6 | length 2449.1
  Top Layer w25: UB09.2@1020,3020 1124,3020 1178,2966 1236,2966 UB09.6@1240,2970 1530,2970 RL17.1@1540,2960 1740,3160 v1(2259,3160) v1(2721,3160) ; 1480.32,2970 cw(c1480.32,2904.25) RL17.1@1526.81,2950.74 ; RL17.1@1557.03,2960 cw(c1598.14,2960) 1569.07,2989.07
  Bottom Layer w25: P-SIGNAL-TEST.1@2247.96,3347.96 cw(c2218.89,3318.89) 2260,3318.89 cw(c2301.11,3318.89) P-SIGNAL-TEST.1@2272.04,3347.96 ; v1(2259,3160) 2260,3161 P-SIGNAL-TEST.1@2260,3360 ; v1@2720,3161 P_SIGNALOUT.1@2720,3320 ; 2720,3278.89 cw(c2761.11,3278.89) 2732.04,3307.96 ccw(c2761.11,3278.89) 2720,3278.89 ; 2720,3278.89 ccw(c2678.89,3278.89) 2707.96,3307.96 cw(c2678.89,3278.89) 2720,3278.89
SIGNAL_LED19: P-SIGNAL-TEST.2 P_SIGNALOUT.2 RL19.1 UB12.2 UB12.6 | length 2026.7
  Top Layer w25: RL19.1@1980,2960 2040,3020 UB12.2@2500,3020 2593,3020 2643,2970 UB12.6@2720,2970 ; RL19.1@1997.03,2960 cw(c2038.14,2960) 2009.07,2989.07
  Bottom Layer w25: P-SIGNAL-TEST.2@2147.96,3347.96 cw(c2118.89,3318.89) 2160,3318.89 cw(c2201.11,3318.89) P-SIGNAL-TEST.2@2172.04,3347.96 ; P-SIGNAL-TEST.2@2147.96,3372.04 ccw(c2118.89,3401.11) 2160,3401.11 ccw(c2201.11,3401.11) P-SIGNAL-TEST.2@2172.04,3372.04 ; v2(2160,3021) P-SIGNAL-TEST.2@2160,3360 2160,3417 2240,3497 2313.25,3497 2459.75,3497 2533,3497 2620,3410 P_SIGNALOUT.2@2620,3320 ; P_SIGNALOUT.2@2607.96,3332.04 ccw(c2578.89,3361.11) 2620,3361.11 ccw(c2661.11,3361.11) P_SIGNALOUT.2@2632.04,3332.04
SIGNAL_LED22: P-SIGNAL-TEST.3 P_SIGNALOUT.3 RL22.1 UB15.2 UB15.6 | length 2781
  Top Layer w25: P-SIGNAL-TEST.3@2060,3360 2132,3432 2463,3432 2520,3375 P_SIGNALOUT.3@2520,3320 ; P-SIGNAL-TEST.3@2060,3377.03 ccw(c2060,3418.14) 2089.07,3389.07 ccw(c2118.14,3360) P-SIGNAL-TEST.3@2077.03,3360 ; P_SIGNALOUT.3@2507.96,3332.04 ccw(c2478.89,3361.11) 2520,3361.11 ccw(c2561.11,3361.11) P_SIGNALOUT.3@2532.04,3332.04 ; v2(2984,3083) 3107,2960 RL22.1@3300,2960 3446,2960 3506,3020 UB15.2@3930,3020 4041,3020 4091,2970 UB15.6@4150,2970 ; RL22.1@3286.81,2950.74 ccw(c3264.46,2928.4) 3264.46,2960 ccw(c3264.46,2991.6) RL22.1@3286.81,2969.26 ; RL22.1@3313.19,2950.74 cw(c3335.54,2928.4) 3335.54,2960 cw(c3335.54,2991.6) RL22.1@3313.19,2969.26
  Bottom Layer w25: P_SIGNALOUT.3@2507.96,3307.96 cw(c2478.89,3278.89) 2520,3278.89 cw(c2561.11,3278.89) P_SIGNALOUT.3@2532.04,3307.96 ; P_SIGNALOUT.3@2520,3320 2520,3158 2595,3083 v2(2984,3083)
pads on no net: U01.1 U01.5 U01.8 U02.1 U02.5 U02.8 U03.1 U03.5 U03.8 U04.1 U04.5 U04.8 U05.1 U05.5 U05.8 U06.1 U06.5 U06.8 U07.1 U07.5 U07.8 U08.1 U08.5 U08.8 U09.1 U09.5 U09.8 U011.1 U011.5 U011.8 U012.1 U012.5 U012.8 U014.1 U014.5 U014.8 U015.1 U015.5 U015.8 UB09.1 UB09.5 UB09.8 UB12.1 UB12.5 UB12.8 UB15.1 UB15.5 UB15.8

## Polygon pours and split planes (outlines as drawn)
AGND on Top Layer "Top Layer-d" (solid, remove dead copper, pour order 1000): 133,3577 4913,3577 5135,3355 5135,74 5094,33 5063,2 1626,2 136,2 49,89 49,3493 133,3577
GROUPGND on Bottom Layer "Top Layer-d" (solid, remove dead copper, pour order 1001): 131,3579 5199,3579 5299,3479 5299,-45 5264,-80 0,-80 -81,1 -81,3486 14,3581

## Keep-outs
Keep-Out Layer:
  lines w10: -145.25,3575 cw(c-95,3575) -100,3625 5331.71,3625 cw(c5331.71,3585.57) 5370.95,3589.49 5370.25,-96.13 cw(c5320,-96.13) 5325,-146.13 -95,-146.13 ; -145,3574.75 -145,-99.75 ccw(c-95,-94.75) -95,-145

## Other copper
Top Layer:
  text "NEU" at 3316,12 h150

## Silkscreen, mask and mechanical layers (free items; w line width, h text height)
Top Overlay:
  lines w10: 5215,-10 5225,0
  text "1" at 3944,3447 h90 r180
  text "1" at 2817,3416 h90 r180
  text "1" at 2357,3385 h90 r180
  text "1" at 313,1498 h90
  text "1" at 4913,917 h90
  text "近红外水分仪" at 3661,56 h160
  text "1" at 2408,35 h90
  text "信号预处理板 .LYK" at 3653,-101 h150